# Altium PCB EE209_PCB.PcbDoc
Units mil, origin at the board's own origin, x right, y up, seen from the top; angles counter-clockwise.
Board outline 3190 x 2670 mil, 2 copper layers (Top Layer, Bottom Layer); 49 components, 37 nets, 176 pads, 2 vias.
Unrouted connection lines stored in the file: 34.
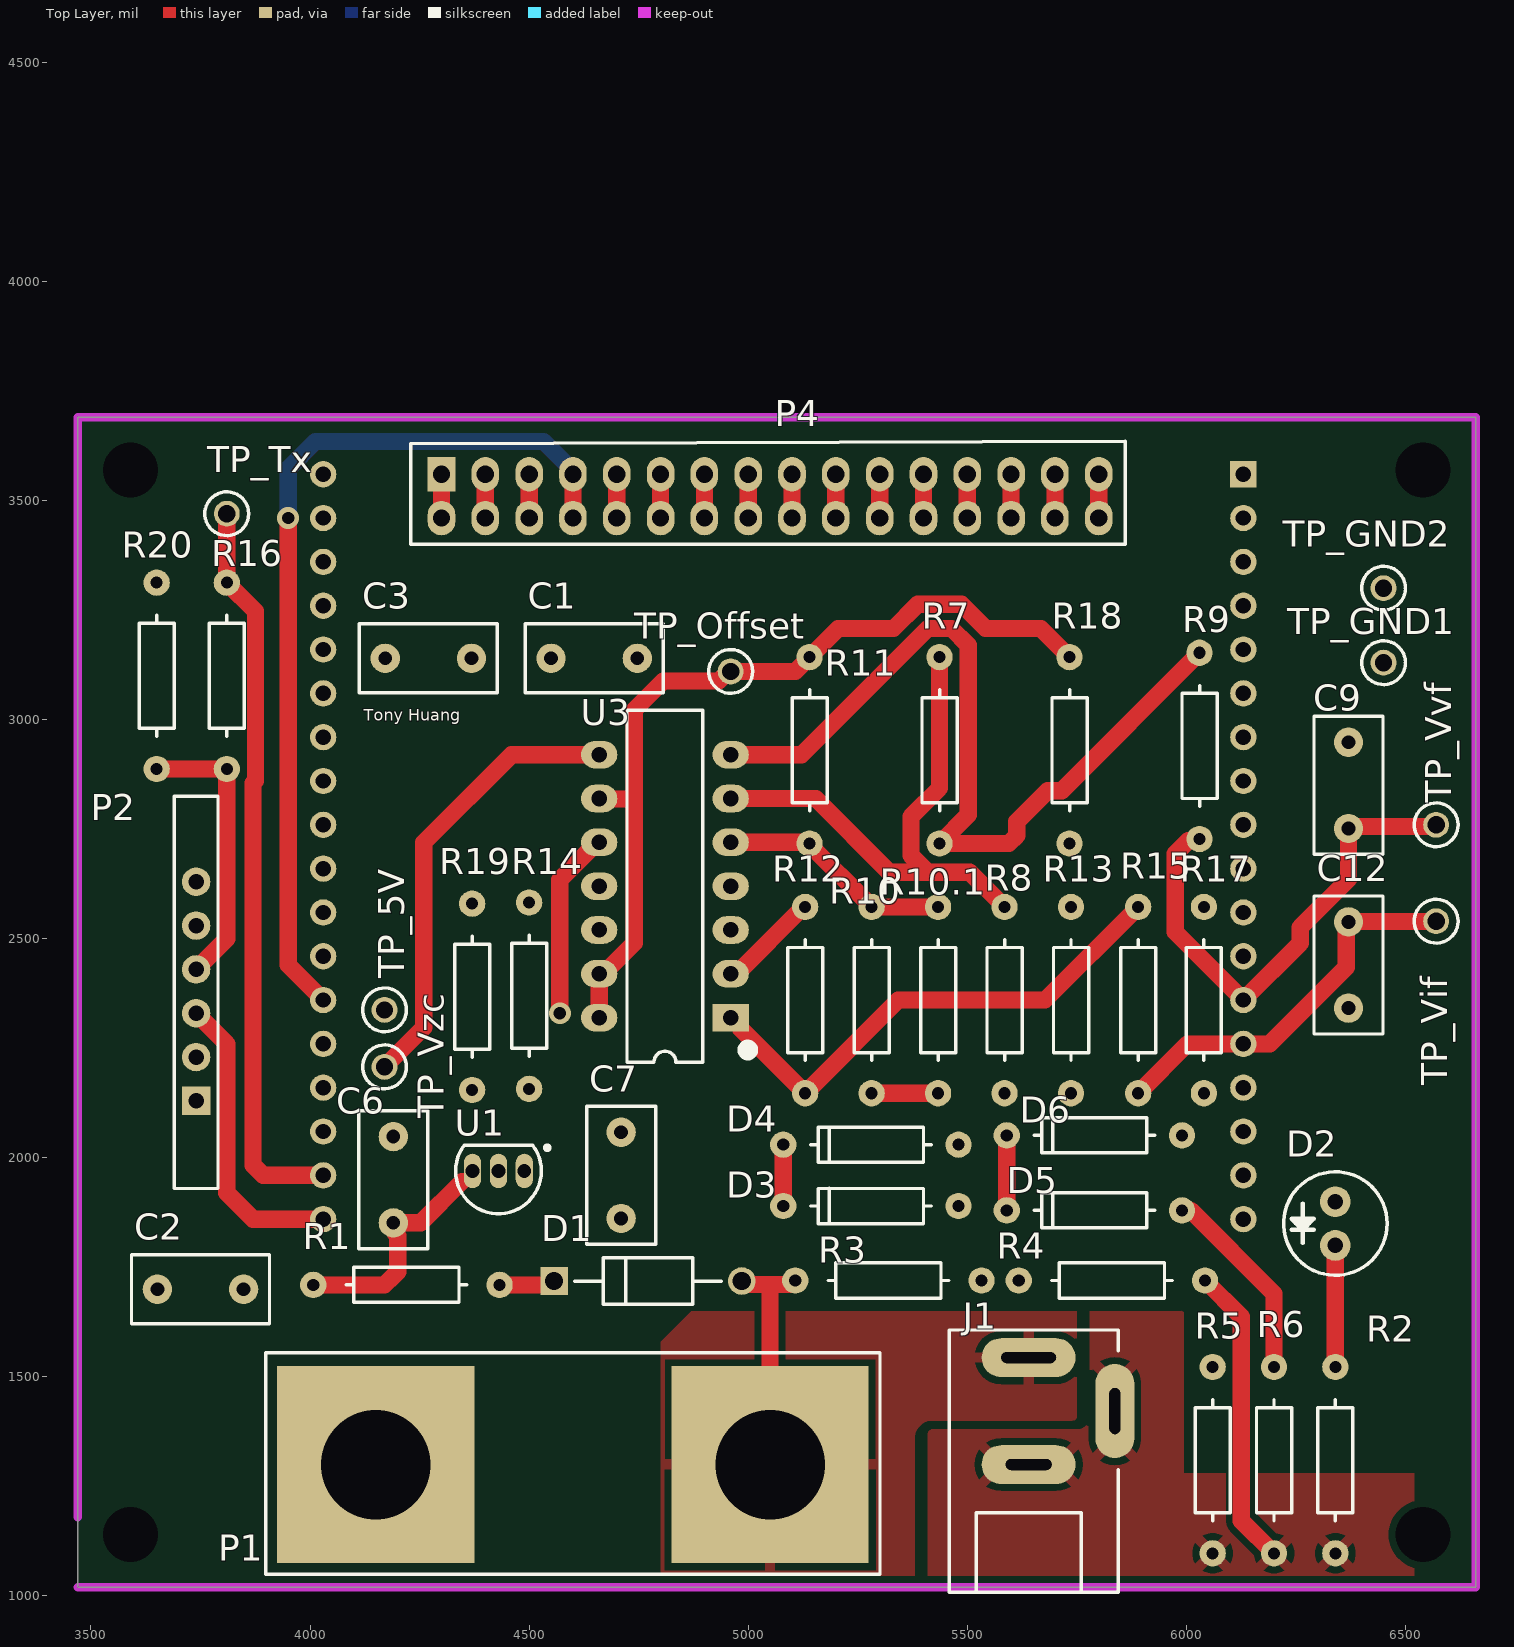
[diagram p0: Top Layer view]
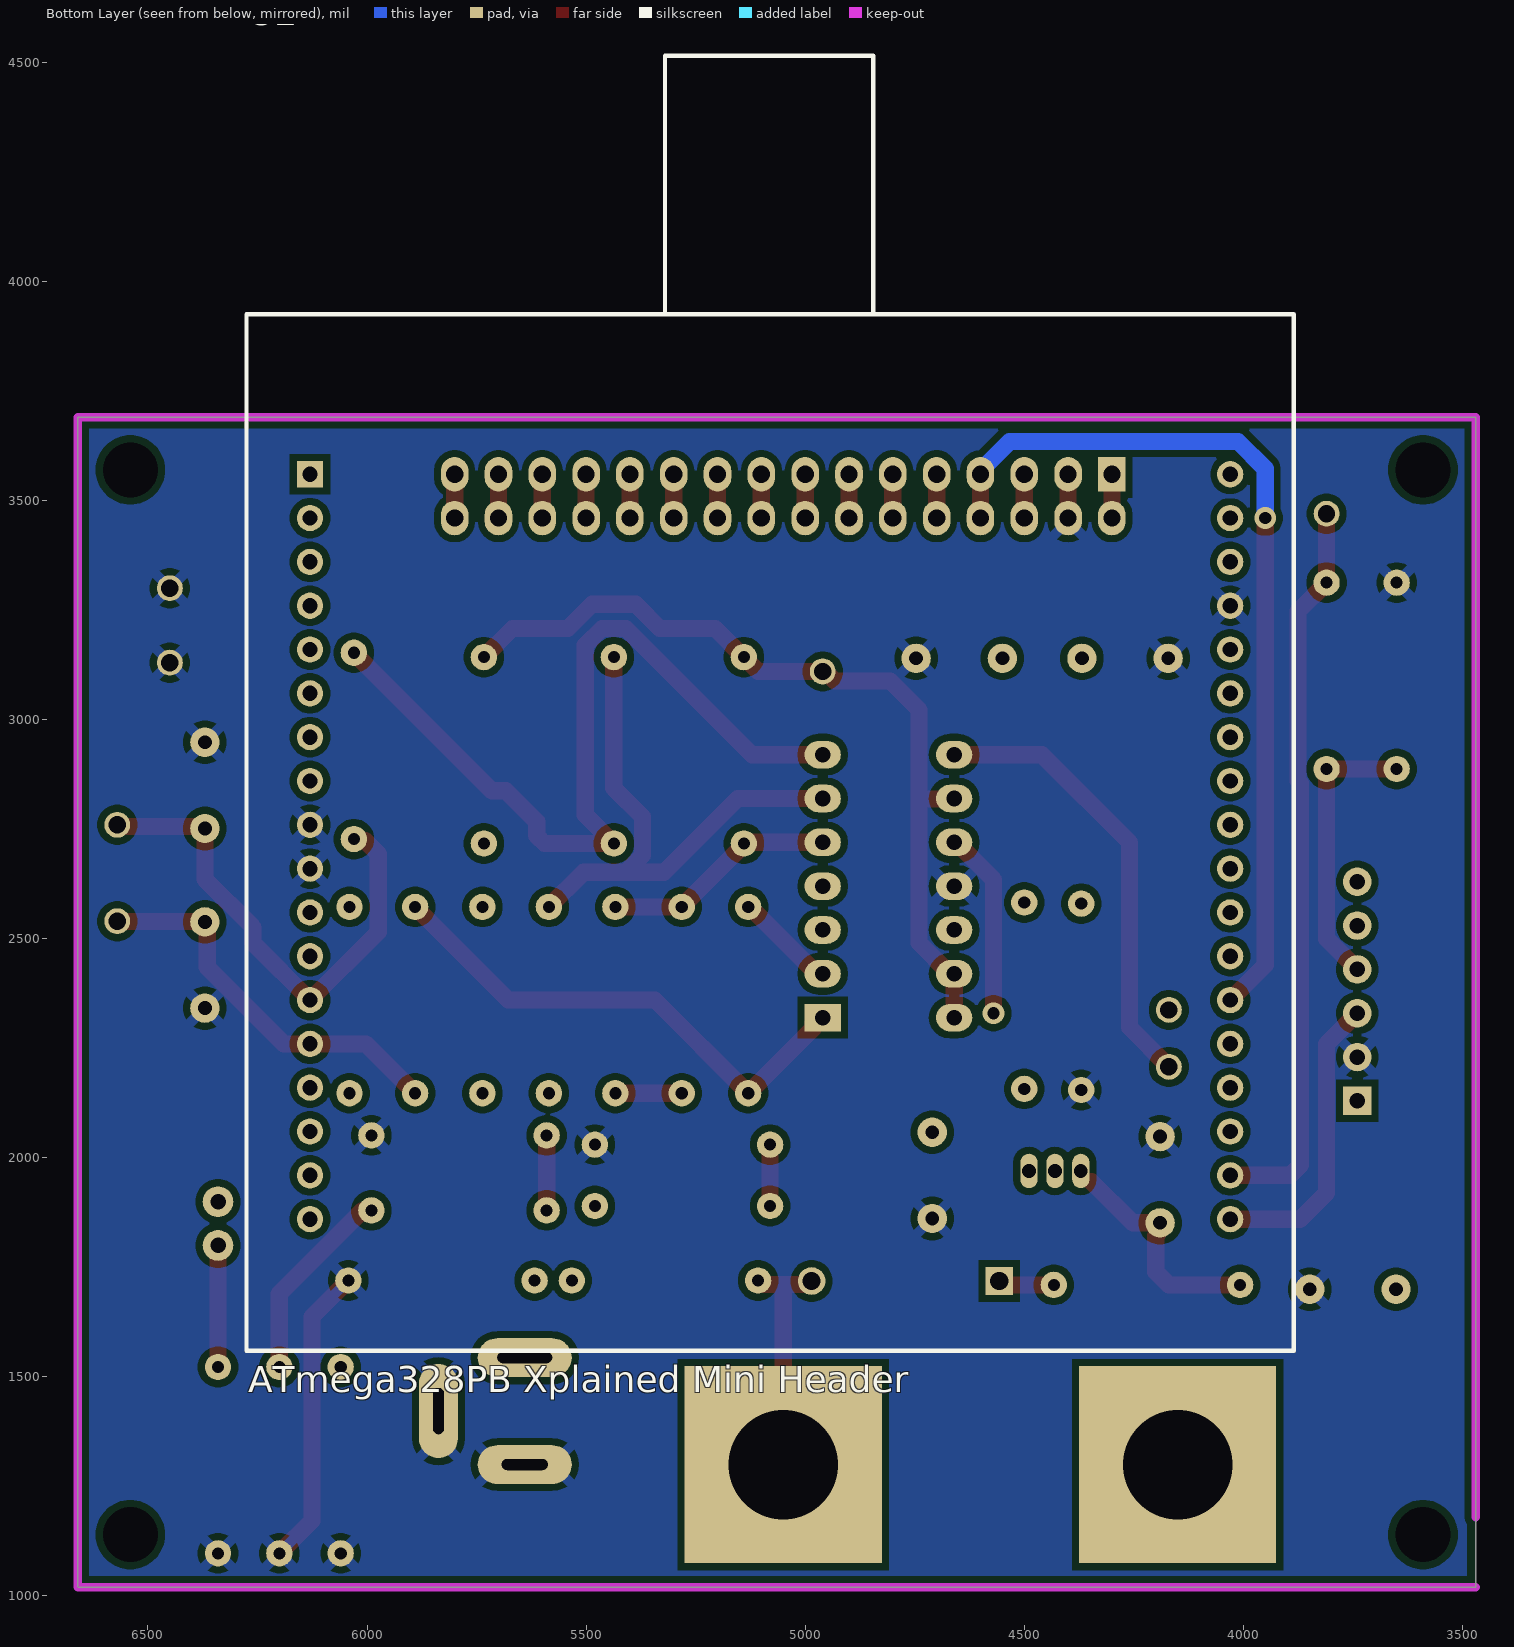
[diagram p1: Bottom Layer view, seen from below]

## Layer stack, top to bottom
Top Solder: solder mask 0.4, Solder Resist, Dk 3.5
Top Layer: signal copper 1.4
Dielectric 1: dielectric 12.6, FR-4, Dk 4.8
Bottom Layer: signal copper 1.4
Bottom Solder: solder mask 0.4, Solder Resist, Dk 3.5

## Board outline
3470,1020 6660,1020 6660,3690 3470,3690

## Design rules (kind name [scope] priority, off if disabled: settings)
BoardOutlineClearance [All] p1: gap=19.68 ignorepadtopadclearanceinfootprint=FALSE
Clearance [All] p1: gap=15.75 ignorepadtopadclearanceinfootprint=FALSE
Height [All] p1: minheight=0 maxheight=1900 prefheight=0.2
HoleSize [All] p1: absolutevalues=TRUE maxlimit=393.7 minlimit=15.75 maxpercent=80.000 minpercent=20.000
MinimumAnnularRing [All] p1: minimumring=3
MinimumSolderMaskSliver [All] p1: minsoldermaskwidth=3.94
PlaneConnect [All] p1: planeconnectstyle=Relief reliefexpansion=23.62 reliefentries=4 reliefconductorwidth=23.62 reliefairgap=15.75
PolygonConnect [All] p1: connectstyle=Relief reliefconductorwidth=23.62 reliefentries=4 polygonreliefangle="45 Angle" airgapwidth=15.75
RoutingVias [All] p1: holewidth=23.62 width=39.37 viastyle="Through Hole" minholewidth=19.68 minwidth=31.5 maxholewidth=39.37 maxwidth=78.74
SMDToCorner [All] p1: distance=157480
SilkToSilkClearance [All] p1: silktosilkclearance=3.94
SilkToSolderMaskClearance [IsPad] p1: minsilkscreentomaskgap=3.94 clearancetoexposedcopper=TRUE
SolderMaskExpansion [All] p1: expansion=4 istentingtop=FALSE
Width [All] p1: maxlimit=393.7 minlimit=15.75 preferedwidth=23.62
24 further rules are at their usual default settings.

## Components (designator, comment, footprint, x,y, rotation, side; value= is the part's Value field where it differs from the comment)
C1 "10uF" CCAP-5P0 4648.43,3140 r0 top value=47uF
C2 "10uF" CCAP-5P0 3750,1700 r0 top value=47uF
C3 "10uF" CCAP-5P0 4270,3140 r180 top value=47uF
C6 "47uF" CCAP-5P0 4190,1950 r90 top
C7 "10uF" CCAP-5P0 4710,1960 r270 top
C9 "16nF" CCAP-5P0 6370,2850 r90 top value=0.16nF
C12 "16nF" CCAP-5P0 6370,2440 r270 top value=0.16nF
D1 "1N4007" 1N4007-MFG 4771.23,1718.77 r0 top
D2 "Green" LED 6340,1850 r270 top
D3 "BZX79-CXVX" AXIAL-Zener-0.4 5280,1890 r180 top
D4 "BZX79-CXVX" AXIAL-Zener-0.4 5280,2030 r180 top
D5 "BZX79-CXVX" AXIAL-Zener-0.4 5790,1880 r180 top
D6 "BZX79-CXVX" AXIAL-Zener-0.4 5790,2051.23 r180 top
J1 "DC barrel jack" AC-Socket 5640,1307.87 r90 top value=socket
P1 "Dual Banana Plugs" "Dual Banana Plug" 4600,1300 r180 top
P2 "BLE Module Header" HM10_HDR1X6 3740,2130 r90 top
P4 "Display" Display 5000,3510 r180 top
R1 "20" AXIAL-0.4 4220,1710 r0 top
R2 "1k" AXIAL-0.4 6340,1310 r270 top value=20
R3 "56k" AXIAL-0.4 5320,1720 r180 top value=100k
R4 "2.7k" AXIAL-0.4 5830,1720 r180 top value=1k2
R5 "1" AXIAL-0.4 6060,1310 r90 top
R6 "1.2" AXIAL-0.4 6200,1310 r90 top value=1
R7 "10k" AXIAL-0.4 5436.66,2930 r270 top value=22k
R8 "10k" AXIAL-0.4 5585.01,2360 r90 top
R9 "1k" AXIAL-0.4 6030,2940 r270 top value=100k
R10 "18k" AXIAL-0.4 5281.67,2360 r90 top
R10.1 "18k" AXIAL-0.4 5433.34,2360 r90 top
R11 "10k" AXIAL-0.4 5140,2930 r270 top value=22k
R12 "22k" AXIAL-0.4 5130,2360 r270 top
R13 "10k" AXIAL-0.4 5736.67,2360 r90 top
R14 "56k" AXIAL-0.4 4500,2370 r270 top
R15 "1k" AXIAL-0.4 5890,2360 r270 top value=100k
R16 "10k" AXIAL-0.4 3810,3100 r270 top
R17 "10k" AXIAL-0.4 6040,2360 r90 top
R18 "22k" AXIAL-0.4 5733.33,2930 r270 top
R19 "39k" AXIAL-0.4 4370,2367.4 r90 top
R20 "10k" AXIAL-0.4 3650,3100 r270 top
TP_5V "5003" TP_TH 4170,2337.59 r90 top
TP_GND1 "5003" TP_TH 6450,3130 r90 top
TP_GND2 "5003" TP_TH 6450,3300 r90 top
TP_Offset "5003" TP_TH 4960,3110 r90 top
TP_Tx "5003" TP_TH 3810,3470 r90 top
TP_Vif "5003" TP_TH 6570,2540 r90 top
TP_Vvf "5003" TP_TH 6570,2760 r90 top
TP_Vzc "5003" TP_TH 4170,2207.59 r90 top
U1 "L78L05ACZ" TO-92 4430,1970 r90 top
U2 "ATmega328PB Xplained Mini Header" "ATmeg328P Xplained" 5080,2710 r180 bottom locked
U3 "LM324" DIP-14 4810,2620 r180 top

## Footprints (in the part's own frame and the unit in brackets; to place one, negate y for a bottom-side part, rotate by r counter-clockwise, add the part's x,y. Pads: shape width x height; smd on the part's side, far side on the other; paste and mask are expansions set on the pad)
1N4007-MFG [mm]
  round 1.6 hole 1.05 paste-1000 mask+0: 1(5.438,0)
  rect 1.6x1.6 hole 1.05 paste-1000 mask+0: 2(-5.438,0)
  silkscreen extent -4.24,-1.35 4.24,1.35, body extent -6.34,-1.45 6.34,1.45, height 0.25
AC-Socket [mm]
  oval 2.25x5.45 hole 0.635 slot 3.175 at 90 deg: 1(6,0)
  oval 5.45x2.25 hole 0.635 slot 2.667 at 0 deg: 2(2.9,-5)
  oval 2.25x5.45 hole 0.635 slot 2.667 at 90 deg: 3(-0.2,0)
  silkscreen extent -7.6,-5.2 7.6,4.6, body extent -6.7,-5 6,4.2, height 10.5
"ATmeg328P Xplained" [mil]
  rect 60x60 hole 35: 1(-1050,850)
  round 60 hole 35: 2(-1050,750) 3(-1050,650) 4(-1050,550) 5(-1050,450) 6(-1050,350) 7(-1050,250) 8(-1050,150) 9(-1050,50) 10(-1050,-50) 11(-1050,-150) 12(-1050,-250) 13(-1050,-350) 14(-1050,-450) 15(-1050,-550) 16(-1050,-650) 17(-1050,-750) 18(-1050,-850) 19(1050,-850) 20(1050,-750) 21(1050,-650) 22(1050,-550) 23(1050,-450) 24(1050,-350) 25(1050,-250) 26(1050,-150) 27(1050,-50) 28(1050,50) 29(1050,150) 30(1050,250) 31(1050,350) 32(1050,450) 33(1050,550) 34(1050,650) 35(1050,750) 36(1050,850)
  silkscreen extent -1195,-1150 1195,1805, body extent -1201,-1150 1161,1845, height 452
AXIAL-0.4 [mil]
  round 60 hole 27.56: 1(-212.6,0) 2(212.6,0)
  silkscreen extent -138,-40 138,40, body extent -224,-51 224,51, height 106
AXIAL-Zener-0.4 [mil]
  round 60 hole 27.56: 1(-200,0) 2(200,0)
  silkscreen extent -138,-40 138,40, body extent -211,-52 211,52, height 92
CCAP-5P0 [mm]
  round 1.7 hole 0.8: 1(-2.5,0) 2(2.5,0)
  silkscreen extent -4,-2 4,2, body extent -3.25,-1.5 3.25,1.5, height 6.5
DIP-14 [mm] "DIP; 14 Leads; Row Spacing 7.62 mm; Pitch 2.54 mm"
  rect 2.1x1.6 hole 0.9: 1(-3.81,7.62)
  oval 2.1x1.6 hole 0.9: 2(-3.81,5.08) 3(-3.81,2.54) 4(-3.81,0) 5(-3.81,-2.54) 6(-3.81,-5.08) 7(-3.81,-7.62) 8(3.81,-7.62) 9(3.81,-5.08) 10(3.81,-2.54) 11(3.81,0) 12(3.81,2.54) 13(3.81,5.08) 14(3.81,7.62)
  silkscreen extent -5.1,-10.2 2.2,10.2, body extent -5.07,-10.2 5.09,10.12, height 9.47
Display [mm]
  rect 1.6x2 hole 1: 1(17.78,-1.27)
  oval 1.6x2 hole 1: 2(17.78,1.27) 3(15.24,-1.27) 4(15.24,1.27) 5(12.7,-1.27) 6(12.7,1.27) 7(10.16,-1.27) 8(10.16,1.27) 9(7.62,-1.27) 10(7.62,1.27) 11(5.08,-1.27) 12(5.08,1.27) 13(2.54,-1.27) 14(2.54,1.27) 15(0,-1.27) 16(0,1.27) 17(-2.54,-1.27) 18(-2.54,1.27) 19(-5.08,-1.27) 20(-5.08,1.27) 21(-7.62,-1.27) 22(-7.62,1.27) 23(-10.16,-1.27) 24(-10.16,1.27) 25(-12.7,-1.27) 26(-12.7,1.27) 27(-15.24,-1.27) 28(-15.24,1.27) 29(-17.78,-1.27) 30(-17.78,1.27) 31(-20.32,-1.27) 32(-20.32,1.27)
  silkscreen extent -21.84,-3.18 19.56,2.79, body extent -32.6,-50 26.4,4, height 13
"Dual Banana Plug" [mil] "Connector; 2 Position"
  rect 450x450 hole 250: 1(-450,0) 2(450,0)
  silkscreen extent -701,-255 701,250, body extent -684,-236 686,236, height 217
HM10_HDR1X6 [mil] "Connector; Header; 6 Position"
  rect 65x65 hole 35.43: 1(0,0)
  round 65 hole 35.43: 2(100,0) 3(200,0) 4(300,0) 5(400,0) 6(500,0)
  silkscreen extent -200,-50 695,50, body extent -142,-39 571,228, height 1843
LED [mil]
  round 70 hole 35.43: 1(-50,0) 2(50,0)
  silkscreen extent -118,-118 118,118, body extent -98,-98 98,98, height 413
TO-92 [mm] "TO, Flat Index; 3 In-Line, Axial Leads; Body Dia. 4.5mm; Leads 0.51 x 0.48 mm (max)"
  oval 2x1 hole 0.8: 1(0,-1.5) 2(0,0) 3(0,1.5)
  silkscreen extent -2.48,-2.96 1.5,2.48, body extent -2.4,-2.4 1.53,2.4, height 6.73
TP_TH [mm] "Test Point, Through Hole, Dia 2.54mm"
  round 1.5 hole 1: 1(0,0)
  silkscreen extent -1.27,-1.27 1.27,1.27, body extent -1.27,-1.27 1.27,1.27, height 4.57

## Part data
C1 C2 C3 C6 C7 C9 C12: library part CerCap_TH_5P0, "TH ceramic capacitor with 5mm pitch"
D1: library part 1N4007_TH_4AX0, "1N4007 1000V standard axial diode", Supplier Part Number 1=1N4007RLGOSCT-ND, ComponentLink1Description=https://www.fairchildsemi.com/datasheets/1N/1N914.pdf, ComponentLink1URL=https://www.fairchildsemi.com/datasheets/1N/1N914.pdf, Supplier 1=Digi-Key
D2: library part LED_TH_2P54, "Typical throughole GaAs LED with 2.54mm pitch", Manufacturer="Generic Components", Class I=Optoelectronic, Class II=LED, Published=8-Jun-2000, Publisher="Altium Limited", Revision="July-2002: Re-released for DXP Platform."
D3 D4 D5 D6: library part Zener_TH_4AX0, "Axial zener diode BZX79 series", Manufacturer="Nexperia USA Inc.", Manufacturer Part Number=BZX79-C4V7,143, Operating Temperature="-65°C ~ 200°C", Package / Case="DO-204AH, DO-35, Axial", Supplier Device Package=DO-35, Supplier Part Number 1=1727-1864-1-ND, Tolerance=±5%, Category="Discrete Semiconductor Products", ComponentLink1Description=https://assets.nexperia.com/documents/data-sheet/BZX79.pdf, ComponentLink1URL=https://assets.nexperia.com/documents/data-sheet/BZX79.pdf, Mounting Type="Through Hole", Packaging="Cut Tape (CT)", Part Status=Active, Pricing 1="1=0.23, 10=0.206, 100=0.1123, 500=0.06912, 1000=0.04714 (NZD)", RoHS="RoHS Compliant", Stock 1=8933, Supplier 1=Digi-Key
J1: library part AC_Input, "DC barrel jack connection to AC source"
P1: library part AC_Output, "Dual banana plugs connection to the AC load", LatestRevisionDate=17-Jul-2002, LatestRevisionNote="Re-released for DXP Platform.", Publisher="Altium Limited"
P2: library part BLEModule_TH, "2.54mm pitch 6-pin header for BLE module", LatestRevisionDate=17-Jul-2002, LatestRevisionNote="Re-released for DXP Platform.", Publisher="Altium Limited"
P4: "16-Pin Header Connecting Display"
R1 R2 R3 R4 R5 R6 R7 R8 R9 R10 R10.1 R11 R12 R13 R14 R15 R16 R17 R18 R19 R20: library part Res_TH_0AX4, "Through hole resistor", ComponentLink1Description=http://www.royalohm.com/pdf/product2017/PrecisionMetalMF.pdf, LatestRevisionDate=17-Jul-2002, LatestRevisionNote="Re-released for DXP Platform.", PackageReference=AXIAL-0.4, Published=8-Jun-2000, Publisher="Altium Limited"
TP_5V TP_GND1 TP_GND2 TP_Offset TP_Tx TP_Vif TP_Vvf TP_Vzc: library part TestPoint, "Test Point, Orange, 1-Pin THD, RoHS", Forward Current="3 A", Forward Voltage="1.08 V", Max Operating Temperature="150 degC", Max Surge Current="80 A", Min Operating Temperature="-65 degC", Package Quantity=500, Peak Reverse Current="600 uA", ComponentLink1Description="Manufacturer URL", ComponentLink1URL=http://www.keyelco.com/, ComponentLink2Description=Datasheet, ComponentLink2URL=http://keyelco.com/userAssets/file/M65p56.pdf, DatasheetVersion=Jun-15, Diameter="5.3 mm", Height="0.25 inch", Length="9.5 mm", Mount="Through Hole", PackageDescription="1-Pin Through Hole Device, Dia 2.54 mm", PackageReference=5003, Packaging=Bulk, Pins=2, Radiation Hardening=No, REACH SVHC="No SVHC", RoHSCompliant=true, Weight="0.01 lb", Width="0.25 inch"
U1: library part L78L05_TH_TO92, "Voltage Regulator 5V", Base Part Number=LM78L05, Current - Output=100mA, Manufacturer="ON Semiconductor", Manufacturer Part Number=LM78L05ACZX, Operating Temperature="-40°C ~ 125°C", Package / Case="TO-226-3, TO-92-3 (TO-226AA) (Formed Leads)", Supplier Device Package=TO-92-3, Supplier Part Number 1=LM78L05ACZXCT-ND, Voltage - Input (Max)=30V, Voltage - Output (Max)=-, Voltage - Output (Min/Fixed)=5V, Category="Integrated Circuits (ICs)", ComponentLink1Description=https://www.fairchildsemi.com/datasheets/MC/MC78L05A.pdf, ComponentLink1URL=https://www.fairchildsemi.com/datasheets/MC/MC78L05A.pdf, Control Features=-, Mounting Type="Through Hole", Output Configuration=Positive, Output Type=Fixed, Packaging="Cut Tape (CT)", Part Status=Active, Pricing 1="1=0.69, 10=0.517, 100=0.3226, 500=0.2207, 1000=0.16976 (NZD)", Protection Features="Over Temperature, Short Circuit", PSRR="80dB (120Hz)", RoHS="RoHS Compliant", Stock 1=7782, Supplier 1=Digi-Key, Voltage Dropout (Max)=-
U2: library part ATmega328PBXplained_TH, "Dual 18-pin headers connecting to ATmega328PB Xplained Mini", Manufacturer="Microchip Technology", Manufacturer Part Number=ATMEGA328PB-XMINI, Operating System=-, Supplier Part Number 1=ATMEGA328PB-XMINI-ND, Board Type="Evaluation Platform", Category="Development Boards, Kits, Programmers", ComponentLink1Description=http://www.microchip.com/mymicrochip/filehandler.aspx?ddocname=en589665, ComponentLink1URL=http://www.microchip.com/mymicrochip/filehandler.aspx?ddocname=en589665, Contents=Board(s), Core Processor=AVR, For Use With/Related Products=ATmega328P, Mounting Type=Fixed, Part Status=Active, Platform="ATmega328P Xplained Mini", Pricing 1="1=15.11 (NZD)", RoHS="RoHS Compliant", Stock 1=454, Supplier 1=Digi-Key, Type="MCU 8-Bit"
U3: library part LM324N_TH_DIP16, "IC OPAMP GP 14DIP", Current - Supply=1mA, Manufacturer="ON Semiconductor", Manufacturer Part Number=LM324N, Operating Temperature="0°C ~ 70°C", Package / Case="14-DIP (0.300\", 7.62mm)", Supplier Device Package=14-DIP, Supplier Part Number 1=LM324NFS-ND, Voltage - Supply, Single/Dual (±)="3 V ~ 32 V, ±1.5 V ~ 16 V", Amplifier Type="General Purpose", Base Part Number=LM324, Category="Integrated Circuits (ICs)", ComponentLink1Description=https://www.fairchildsemi.com/datasheets/LM/LM2902.pdf, ComponentLink1URL=https://www.fairchildsemi.com/datasheets/LM/LM2902.pdf, Mounting Type="Through Hole", Output Type=-, Packaging=Tube, Part Status=Active, Pricing 1="1=0.9, 10=0.775, 100=0.5789, 500=0.45482, 1000=0.35145 (NZD)", RoHS="RoHS Compliant", Slew Rate=-, Stock 1=2900, Supplier 1=Digi-Key

## Free pads (board coordinates)
  round 60 hole 125.98: 3(3590,1140) 3(3590,3570) 3(6540,1140) 3(6540,3570)

## Via types
v1: diameter 50, hole 28, Top Layer to Bottom Layer, 2 vias

## Nets (pads, with @x,y where several pads share a name; then routed paths per layer and width w, separated by ;. In a path a pad name is that pad's centre, name@x,y a point inside that pad or via, vN(x,y) a via of type N, cw(c..) or ccw(c..) an arc to the next point about the centre after c; other vN are vias at no path point)
5V: C1.1 C2.1 C3.1 C7.1 D2.1 P2.1 P4.1 P4.2 P4.31 P4.32 R14.2 TP_5V.1 U1.1 U3.4 | length 200
  Top Layer w39.37: P4.2 P4.1 ; P4.32 P4.31
DS1: P4.5 P4.6 U2.23 | length 100
  Top Layer w39.37: P4.6 P4.5
DS2: P4.7 P4.8 U2.24 | length 2064.9
  Top Layer w39.37: v1(3950,3460) 3950,2440 U2.24 ; P4.8 P4.7 P4.7@4600,3567.87
  Bottom Layer w39.37: v1(3950,3460) 3950,3572.54 4012.27,3634.8 4533.07,3634.8 4600,3567.87 P4.7
DS3: P4.9 P4.10 U2.25 | length 100
  Top Layer w39.37: P4.10 P4.9
DS4: P4.11 P4.12 U2.26 | length 100
  Top Layer w39.37: P4.12 P4.11
GND: C1.2 C2.2 C3.2 C6.2 C7.2 C9.2 C12.2 D4.1 D6.1 J1.2 J1.3 P2.2 P4.3 P4.4 R2.2 R4.1 R5.1 R6.1 R19.1 R20.1 TP_GND1.1 TP_GND2.1 U1.2 U2.9 U2.10 U2.33 U3.11 | length 787.8
  Top Layer w39.37: P4.4 P4.3 ; R4.1 6125.43,1637.17 6125.43,1171.97 R6.1
Imeas: C12.1 R15.2 TP_Vif.1 U2.14 | length 900.3
  Top Layer w39.37: R15.2 6002.6,2260 U2.14 6190,2260 6364.73,2434.73 6364.73,2533.15 C12.1 6370.79,2539.21 6569.21,2539.21 TP_Vif.1
LED1: P4.13 P4.14 | length 100
  Top Layer w39.37: P4.14 P4.13
LED2: P4.15 P4.16 | length 100
  Top Layer w39.37: P4.16 P4.15
LED3: P4.17 P4.18 | length 100
  Top Layer w39.37: P4.18 P4.17
LED4: P4.19 P4.20 | length 100
  Top Layer w39.37: P4.20 P4.19
NetD1_2: D1.2 R1.2 | length 126.4
  Top Layer w15.75: D1.2@4548.36,1710 D1.2@4555.91,1717.55
  Top Layer w39.37: R1.2 D1.2@4548.36,1710
NetD2_2: D2.2 R2.1 | length 277.4
  Top Layer w39.37: R2.1 D2.2
NetD3_2: D3.2 D4.2 | length 140
  Top Layer w39.37: D3.2 D4.2
NetD5_2: D5.2 D6.2 | length 171.2
  Top Layer w39.37: D5.2 D6.2
NetP2_4: P2.4 R16.2 R20.2 | length 659.7
  Top Layer w15.75: P2.4 P2.4@3749.42,2420.58
  Top Layer w39.37: R20.2 R16.2 3810,2500 P2.4
NetR7_1: R7.1 R8.2 U3.6 | length 1261.1
  Top Layer w39.37: U3.6 5154.13,2820 5322.16,2651.97 5409.56,2651.97 ; R7.1 5436.66,2843.75 5371.23,2778.32 5371.23,2690.3 5409.56,2651.97 ; R8.2 5505.64,2651.97 5409.56,2651.97
NetR7_2: R7.2 R9.1 U3.7 | length 1949
  Top Layer w39.37: U3.7 5121.53,2920 5409.56,3208.03 5463.77,3208.03 5502.1,3169.7 5502.1,2782.83 R7.2 5594.8,2717.4 5612.78,2735.38 5612.78,2767.34 5683.4,2837.95 5715.35,2837.95 R9.1
NetR10.1_2: R10.1.2 R10.2 R11.2 U3.5 | length 534.4
  Top Layer w39.37: U3.5 5134.27,2720 R10.2 R10.1.2
NetR12_1: R12.1 R13.2 U3.2 | length 233.2
  Top Layer w39.37: U3.2 4973.62,2420 5126.22,2572.6 R12.1
NetR12_2: R12.2 R15.1 U3.1 | length 1181.6
  Top Layer w39.37: U3.1 4969.84,2320 4981.65,2308.19 4981.65,2295.75 R12.2 5342.6,2360 5677.4,2360 R15.1@5887.7,2570.3
NetR14_1: R14.1 R19.2 U3.12
NetR17_2: R17.2 R18.2 U3.3 | length 5.6
  Top Layer w39.37: R17.2 R17.2@6040,2578.18
OE: P4.27 P4.28 | length 100
  Top Layer w39.37: P4.28 P4.27
Offset: R11.1 R18.1 TP_Offset.1 U2.15 U3.9 U3.13 U3.14 | length 1963
  Top Layer w39.37: U3.14 U3.13 4669.84,2420 4740,2490.16 4740,2818.9 ; U3.9@4661.1,2818.9 4740,2818.9 ; R18.1 5667.9,3208.03 5541.72,3208.03 5486.6,3263.15 5386.73,3263.15 5331.61,3208.03 5205.43,3208.03 R11.1 5107.4,3110 4954.67,3110 4932.72,3088.04 4805.91,3088.04 4740,3022.14 4740,2818.9
RX: P2.3 U2.19 | length 683.8
  Top Layer w39.37: P2.3 3810,2260 3810,1920 3870,1860 U2.19
SH_CP: P4.23 P4.24 U2.16 | length 100
  Top Layer w39.37: P4.24 P4.23
SH_DS: P4.29 P4.30 U2.17 | length 100
  Top Layer w39.37: P4.30 P4.29
SH_ST: P4.25 P4.26 U2.18 | length 100
  Top Layer w39.37: P4.26 P4.25
SRCLR: P4.21 P4.22 | length 100
  Top Layer w39.37: P4.22 P4.21
TX: R16.1 TP_Tx.1 U2.20 | length 1685.8
  Top Layer w39.37: TP_Tx.1 R16.1 3875.43,3247.17 3875.43,2860.3 3870,2854.87 3870,1983.06 3893.06,1960 U2.20
Vin: D1.1 J1.1 P1.1 R3.2 | length 528.2
  Top Layer w15.75: D1.1@4984.09,1717.55 D1.1 D1.1@4993.32,1710.78 ; R3.2@5096.63,1710.78 R3.2@5097.4,1710
  Top Layer w39.37: D1.1@4993.32,1710.78 5050,1710.78 ; P1.1 5050,1710.78 ; R3.2@5096.63,1710.78 5050,1710.78
Vis: D5.1 P1.2 R5.2 R6.2 R13.1 R17.1 | length 450.2
  Top Layer w23.62: R5.2 R5.2@6069.99,1512.6
  Top Layer w39.37: D5.1@6010,1880 6200,1690 R6.2
Vmeas: C9.1 R9.2 TP_Vvf.1 U2.13 U3.10 | length 1592.1
  Top Layer w39.37: v1(4570,2330) 4570,2634.49 4655.51,2720 U3.10 ; R9.2 6026.05,2723.45 6004,2723.45 5974.57,2694.02 5974.57,2515.43 U2.13 6260,2490 6260,2525.86 6370,2635.86 C9.1 6374.66,2756.23 6566.23,2756.23 TP_Vvf.1
Vrect: C6.1 R1.1 U1.3 | length 558.5
  Top Layer w15.75: 4346.74,1945.8 4360.03,1945.8 4370.94,1956.71 U1.3
  Top Layer w39.37: R1.1 4170,1710 4190,1730 4200,1740 4200,1822.09 4195.27,1826.81 4195.27,1846.3 C6.1 4252.52,1851.57 4346.74,1945.8
Vvs: D3.1 R3.1 R4.2 R8.1 R10.1 R10.1.1 | length 151.7
  Top Layer w39.37: R10.1 R10.1.1
Vzc: TP_Vzc.1 U2.21 U3.8 | length 1032.5
  Top Layer w39.37: TP_Vzc.1 4259.63,2297.23 4259.63,2719.63 4460,2920 U3.8
pads on no net: P2.5 P2.6 U2.1 U2.2 U2.3 U2.4 U2.5 U2.6 U2.7 U2.8 U2.11 U2.12 U2.22 U2.27 U2.28 U2.29 U2.30 U2.31 U2.32 U2.34 U2.35 U2.36

## Polygon pours and split planes (outlines as drawn)
GND on Top Layer "GND_L01_P005" (solid, pour order 5): 5993.52,1280 5993.52,1650.55 5780,1649.34 5780,1410 cw(c5750,1410) 5750,1380 5420,1380 ccw(c5420,1370) 5410,1370 5410,1020 6499.83,1020 6520,1040.17 6520,1280
Vin on Top Layer "VIN_L01_P004" (solid, pour order 4): 4800,990 4800,1000 4800,1580 4870,1650 5750,1650 5750,1410 cw(c5740,1410) 5740,1400 5420,1400 ccw(c5420,1360) 5380,1360 5380,1010 4820,1570 5400,990 4800,990 4800,1000
GND on Bottom Layer "GND_L02_P003" (solid, pour order 3): 3490,3690 6640,3690 6640,1000 3490,1000

## Keep-outs
Keep-Out Layer:
  lines w19.68: 3470,1020 6660,1020 6660,3690 3470,3690 3470,1180

## Other copper
Top Layer:
  text "." at 6530,1110 h60

## Silkscreen, mask and mechanical layers (free items; w line width, h text height)
Top Overlay:
  text "Tony Huang" at 4122.21,2988.44 h45
Mechanical 1:
  lines w19.68: 3470,3660.03 3470,3690 ; 3470,3660.03 3470,3690 ; 3470,3660.03 3470,3690 ; 3470,3660.03 3470,2970 3470,2140 3470,1020 6660,1020 6660,3690 3470,3690